# Altium PCB SPT3G_LCBoardRev2.PcbDoc (part 2 of 3)
Units mil, origin at the board's own origin, x right, y up, seen from the top; angles counter-clockwise.
Board outline 7216.28 x 1969 mil, 6 copper layers (Top Layer, Signal Layer 1, Internal Plane 1, Internal Plane 2, Signal Layer 2, Bottom Layer), stack 61.6 mil thick; 29 components, 149 nets, 695 pads, 136 vias.
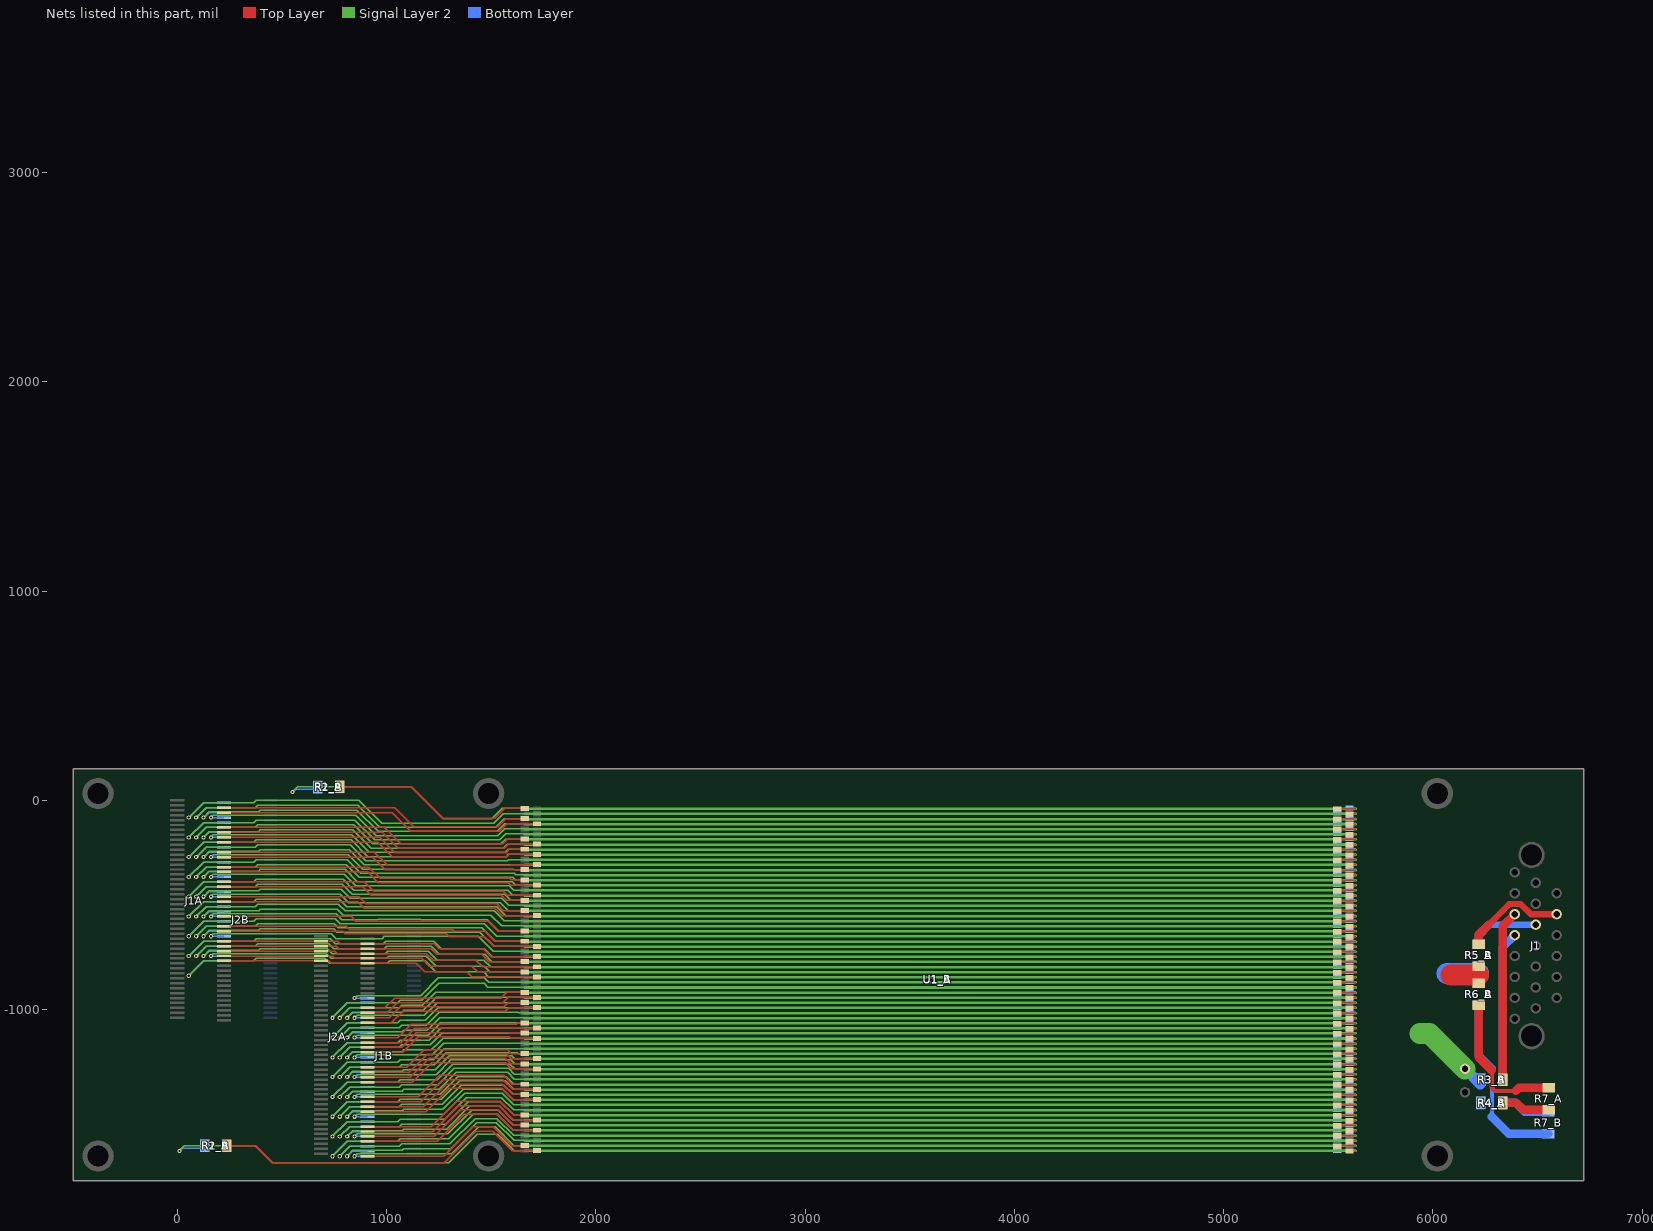
[diagram p6: the nets of this part, all layers, seen from the top]

## Via types
v1: diameter 20, hole 10, Top Layer to Bottom Layer, 136 vias

## Nets (pads, with @x,y where several pads share a name; then routed paths per layer and width w, separated by ;. In a path a pad name is that pad's centre, name@x,y a point inside that pad or via, vN(x,y) a via of type N, cw(c..) or ccw(c..) an arc to the next point about the centre after c; other vN are vias at no path point) (continued)
BOLORETURN_B: J1B.1 J1B.3 J1B.5 J1B.7 J1B.9 J1B.11 J1B.13 J1B.15 J1B.17 J1B.19 J1B.21 J1B.23 J1B.25 J1B.27 J1B.29 J1B.31 J1B.33 J1B.35 J1B.37 J1B.39 J1B.41 J1B.43 J1B.45 J1B.47 J1B.49 J1B.51 J1B.53 J1B.55 J1B.57 J1B.59 J1B.61 J1B.63 J1B.65 J2B.25 J2B.27 J2B.29 J2B.31 J2B.33 J2B.35 J2B.37 J2B.39 J2B.41 J2B.43 J2B.45 J2B.47 J2B.49 J2B.51 J2B.53 J2B.55 J2B.57 J2B.59 J2B.61 J2B.63 J2B.65 J2B.67 J2B.69 J2B.71 J2B.73 J2B.75 J2B.77 J2B.79 J2B.81 J2B.83 J2B.85 J2B.87 J2B.89 pad.0@6153.59,-1283.27 R1_B.1 R2_B.1 R3_B.1 R4_B.1 | length 368161.4
  Signal Layer 2 w6: v1(10.74,-1675.14) 34.64,-1651.23 34.74,-1651.33 373.22,-1651.33 453.76,-1731.87 1297.1,-1731.87 1433.61,-1595.35 ; v1(55.12,-838.58) 125.98,-767.72 366.67,-767.72 378.48,-755.91 704.48,-755.91 727.52,-778.94 ; v1(55.12,-744.09) 125.98,-673.23 366.67,-673.23 378.48,-661.42 731.57,-661.42 755.19,-685.04 ; v1(55.12,-649.61) 125.98,-578.74 366.67,-578.74 378.48,-566.93 755.66,-566.93 778.56,-589.83 965.39,-589.83 ; v1(55.12,-555.12) 125.98,-484.25 366.67,-484.25 378.48,-472.44 774.31,-472.44 810.77,-508.9 1482.39,-508.9 ; v1(55.12,-460.63) 125.98,-389.76 366.67,-389.76 378.48,-377.95 792.96,-377.95 843.91,-428.9 1482.39,-428.9 ; v1(55.12,-366.14) 125.98,-295.28 366.67,-295.28 378.48,-283.46 811.61,-283.46 877.05,-348.9 1482.39,-348.9 ; v1(55.12,-271.65) 125.98,-200.79 366.67,-200.79 378.48,-188.98 830.26,-188.98 910.18,-268.9 1482.39,-268.9 ; v1(55.12,-177.17) 125.98,-106.3 366.67,-106.3 378.48,-94.49 848.91,-94.49 943.32,-188.9 1482.39,-188.9 ; v1(55.12,-82.68) 125.98,-11.81 366.67,-11.81 378.48,0 867.55,0 976.46,-108.9 1482.39,-108.9 ; v1(90.55,-744.09) 137.8,-696.85 373.9,-696.85 385.71,-685.04 723.37,-685.04 746.99,-708.66 ; v1(90.55,-649.61) 137.8,-602.36 373.9,-602.36 385.71,-590.55 750.69,-590.55 769.74,-609.61 ; v1(90.55,-555.12) 137.8,-507.87 373.9,-507.87 385.71,-496.06 769.65,-496.06 802.49,-528.9 1482.39,-528.9 ; v1(90.55,-460.63) 137.8,-413.39 373.9,-413.39 385.71,-401.57 788.3,-401.57 835.63,-448.9 1482.39,-448.9 ; v1(90.55,-366.14) 137.8,-318.9 373.9,-318.9 385.71,-307.09 806.95,-307.09 868.76,-368.9 1482.39,-368.9 ; v1(90.55,-271.65) 137.8,-224.41 373.9,-224.41 385.71,-212.6 825.59,-212.6 901.9,-288.9 1482.39,-288.9 ; v1(90.55,-177.17) 137.8,-129.92 373.9,-129.92 385.71,-118.11 844.24,-118.11 935.04,-208.9 1482.39,-208.9 ; v1(90.55,-82.68) 137.8,-35.43 373.9,-35.43 385.71,-23.62 862.89,-23.62 968.17,-128.9 1482.39,-128.9 ; v1(125.98,-744.09) 153.54,-716.54 388.33,-716.54 396.2,-708.66 717.57,-708.66 741.28,-732.36 ; v1(125.98,-649.61) 153.54,-622.05 388.33,-622.05 396.2,-614.17 746.66,-614.17 762.09,-629.61 ; v1(125.98,-555.12) 153.54,-527.56 388.33,-527.56 396.2,-519.68 764.99,-519.68 794.2,-548.9 1482.39,-548.9 ; v1(125.98,-460.63) 153.54,-433.07 388.33,-433.07 396.2,-425.2 783.63,-425.2 827.34,-468.9 1482.39,-468.9 ; v1(125.98,-366.14) 153.54,-338.58 388.33,-338.58 396.2,-330.71 802.28,-330.71 860.48,-388.9 1482.39,-388.9 ; v1(125.98,-271.65) 153.54,-244.09 388.33,-244.09 396.2,-236.22 820.93,-236.22 893.61,-308.9 1482.39,-308.9 ; v1(125.98,-177.17) 153.54,-149.61 388.33,-149.61 396.2,-141.73 839.58,-141.73 926.75,-228.9 1482.39,-228.9 ; v1(125.98,-82.68) 153.54,-55.12 388.33,-55.12 396.2,-47.24 858.23,-47.24 959.89,-148.9 1482.39,-148.9 ; v1(161.42,-744.09) 173.23,-732.28 712.68,-732.28 736.3,-755.91 ; v1(161.42,-649.61) 173.23,-637.8 736.17,-637.8 759.79,-661.42 ; v1(161.42,-555.12) 173.23,-543.31 760.32,-543.31 786.84,-569.83 957.11,-569.83 957.33,-569.61 1164,-569.61 ; v1(161.42,-460.63) 173.23,-448.82 778.97,-448.82 819.06,-488.9 1482.39,-488.9 ; v1(161.42,-366.14) 173.23,-354.33 797.62,-354.33 852.19,-408.9 1482.39,-408.9 ; v1(161.42,-271.65) 173.23,-259.84 816.27,-259.84 885.33,-328.9 1482.39,-328.9 ; v1(161.42,-177.17) 173.23,-165.35 834.92,-165.35 918.47,-248.9 1482.39,-248.9 ; v1(161.42,-82.68) 173.23,-70.87 853.57,-70.87 951.6,-168.9 1482.39,-168.9 ; v1(550.8,40.1) 574.7,64 1118.5,64 1271.4,-88.9 ; 727.75,-779.53 908.43,-779.53 1004.43,-779.53 1016.24,-767.72 1184.37,-767.72 1236.29,-819.63 ; 735.95,-755.91 997.78,-755.91 1009.59,-744.09 1190.45,-744.09 1238.23,-791.87 ; v1(741.1,-1700.79) 811.97,-1629.92 1052.66,-1629.92 1064.47,-1618.11 1297.72,-1618.11 1415.13,-1500.7 ; v1(741.1,-1606.3) 811.97,-1535.43 1052.66,-1535.43 1064.47,-1523.62 1130.87,-1523.62 1279.07,-1523.62 1381.99,-1420.7 ; v1(741.1,-1511.81) 811.97,-1440.94 1052.66,-1440.94 1064.47,-1429.13 1130.87,-1429.13 1260.42,-1429.13 1348.86,-1340.7 ; v1(741.1,-1417.32) 811.97,-1346.46 1052.66,-1346.46 1064.47,-1334.65 1130.87,-1334.65 1241.77,-1334.65 1315.72,-1260.7 ; v1(741.1,-1322.83) 811.97,-1251.97 1052.66,-1251.97 1064.47,-1240.16 1130.87,-1240.16 1222.52,-1240.16 1247.87,-1214.8 ; v1(741.1,-1228.35) 811.97,-1157.48 1052.65,-1157.48 1064.47,-1145.67 1130.87,-1145.67 1203.87,-1145.67 1214.73,-1134.8 1215.34,-1134.8 1252.96,-1097.19 ; v1(741.1,-1133.86) 811.97,-1062.99 1052.65,-1062.99 1064.47,-1051.18 1130.87,-1051.18 1185.83,-1051.18 1231.43,-1005.57 ; v1(741.1,-1039.37) 811.97,-968.5 1052.66,-968.5 1064.47,-956.69 1130.87,-956.69 1167.18,-956.69 1248.73,-875.14 ; 741.12,-732.28 908.43,-732.28 993.12,-732.28 1004.93,-720.47 1199.42,-720.47 1243.06,-764.12 ; 746.79,-708.66 908.43,-708.66 988.46,-708.66 1000.27,-696.85 1213.1,-696.85 1252.61,-736.36 ; 754.9,-685.04 908.43,-685.04 983.42,-685.04 995.23,-673.23 1226.41,-673.23 1261.79,-708.61 ; 759.56,-661.42 908.43,-661.42 978.66,-661.42 989.23,-650.84 1129.63,-650.84 ; 761.99,-629.83 981.96,-629.83 982.18,-629.61 1139.15,-629.61 ; 770.28,-609.83 973.68,-609.83 973.9,-609.61 1147.43,-609.61 ; v1(776.54,-1700.79) 823.78,-1653.54 1059.88,-1653.54 1071.69,-1641.73 1302.38,-1641.73 1423.42,-1520.7 ; v1(776.54,-1606.3) 823.78,-1559.06 1059.88,-1559.06 1071.69,-1547.24 1130.87,-1547.24 1283.73,-1547.24 1390.28,-1440.7 ; v1(776.54,-1511.81) 823.78,-1464.57 1059.88,-1464.57 1071.69,-1452.76 1130.87,-1452.76 1265.08,-1452.76 1357.14,-1360.7 ; v1(776.54,-1417.32) 823.78,-1370.08 1059.88,-1370.08 1071.69,-1358.27 1130.87,-1358.27 1246.43,-1358.27 1324,-1280.7 ; v1(776.54,-1322.83) 823.78,-1275.59 1059.88,-1275.59 1071.69,-1263.78 1130.87,-1263.78 1227.18,-1263.78 1256.16,-1234.8 ; v1(776.54,-1228.35) 823.78,-1181.1 1059.88,-1181.1 1071.69,-1169.29 1130.87,-1169.29 1208.53,-1169.29 1223.02,-1154.8 1223.63,-1154.8 1257.73,-1120.7 ; v1(776.54,-1133.86) 823.78,-1086.61 1059.88,-1086.61 1071.69,-1074.8 1130.87,-1074.8 1190.49,-1074.8 1251.37,-1013.92 ; v1(776.54,-1039.37) 823.78,-992.13 1059.88,-992.13 1071.69,-980.31 1171.84,-980.31 1206.72,-945.43 ; v1(811.97,-1700.79) 839.53,-1673.23 1074.31,-1673.23 1082.19,-1665.35 1307.04,-1665.35 1431.7,-1540.7 ; v1(811.97,-1606.3) 839.53,-1578.74 1074.31,-1578.74 1082.19,-1570.87 1130.87,-1570.87 1288.39,-1570.87 1398.56,-1460.7 ; v1(811.97,-1511.81) 839.53,-1484.25 1074.31,-1484.25 1082.19,-1476.38 1130.87,-1476.38 1269.75,-1476.38 1365.43,-1380.7 ; v1(811.97,-1417.32) 839.53,-1389.76 1074.31,-1389.76 1082.19,-1381.89 1130.87,-1381.89 1251.1,-1381.89 1332.29,-1300.7 ; v1(811.97,-1322.83) 839.53,-1295.28 1074.31,-1295.28 1082.19,-1287.4 1130.87,-1287.4 1232.45,-1287.4 1299.15,-1220.7 ; v1(811.97,-1228.35) 839.53,-1200.79 1074.31,-1200.79 1082.19,-1192.91 1130.87,-1192.91 1213.19,-1192.91 1231.3,-1174.8 1231.91,-1174.8 1266.02,-1140.7 ; v1(811.97,-1133.86) 839.53,-1106.3 1074.31,-1106.3 1082.19,-1098.43 1130.87,-1098.43 1194.54,-1098.43 1198.17,-1094.8 1198.77,-1094.8 1251.9,-1041.68 ; v1(811.97,-1039.37) 839.53,-1011.81 1074.31,-1011.81 1082.19,-1003.94 1130.87,-1003.94 1176.5,-1003.94 1220.87,-959.57 ; v1(847.4,-1700.79) 859.21,-1688.98 1311.71,-1688.98 1439.98,-1560.7 ; v1(847.4,-1606.3) 859.21,-1594.49 1130.87,-1594.49 1293.06,-1594.49 1406.85,-1480.7 ; v1(847.4,-1511.81) 859.21,-1500 1130.87,-1500 1274.41,-1500 1373.71,-1400.7 ; v1(847.4,-1417.32) 859.21,-1405.51 1130.87,-1405.51 1255.76,-1405.51 1340.57,-1320.7 ; v1(847.4,-1322.83) 859.21,-1311.02 1130.87,-1311.02 1237.11,-1311.02 1307.44,-1240.7 ; v1(847.4,-1228.35) 859.21,-1216.54 1130.87,-1216.54 1217.85,-1216.54 1239.59,-1194.8 ; v1(847.4,-1133.86) 859.21,-1122.05 1130.87,-1122.05 1199.21,-1122.05 1206.45,-1114.8 1207.06,-1114.8 1252.43,-1069.43 ; v1(847.4,-1039.37) 859.21,-1027.56 1181.16,-1027.56 1235.01,-973.71 ; v1(847.4,-944.88) 859.21,-933.07 1162.52,-933.07 1248.2,-847.39 ; 965.61,-589.61 1155.72,-589.61 ; 1129.63,-650.88 1245.37,-650.65 ; 1139.37,-629.83 1276.09,-629.83 ; 1147.66,-609.83 1301.54,-609.83 ; 1155.94,-589.83 1326.98,-589.83 ; 1164.22,-569.83 1482.39,-569.83 ; 1272.62,-1161.77 1719.5,-1161.77 ; 1630.09,-1674.36 1660.44,-1674.36 ; 1630.09,-1649.95 1719.5,-1649.95 ; 1630.09,-1625.54 1660.44,-1625.54 ; 1630.09,-1601.14 1719.5,-1601.14 ; 1630.09,-1576.73 1660.44,-1576.73 ; 1630.09,-1552.32 1719.5,-1552.32 ; 1630.09,-1527.91 1660.44,-1527.91 ; 1630.09,-1503.5 1719.5,-1503.5 ; 1630.09,-1479.09 1660.44,-1479.09 ; 1630.09,-1454.68 1719.5,-1454.68 ; 1630.09,-1430.27 1660.44,-1430.27 ; 1630.09,-1405.86 1719.5,-1405.86 ; 1630.09,-1381.45 1660.44,-1381.45 ; 1630.09,-1357.04 1719.5,-1357.04 ; 1630.09,-1332.63 1660.44,-1332.63 ; 1630.09,-1308.22 1719.5,-1308.22 ; 1630.09,-1283.81 1660.44,-1283.81 ; 1630.09,-1259.4 1719.5,-1259.4 ; 1630.09,-1234.99 1660.44,-1234.99 ; 1630.09,-1210.58 1719.5,-1210.58 ; 1630.09,-1186.17 1660.44,-1186.17 ; 1630.09,-1137.36 1660.44,-1137.36 ; 1630.09,-1112.95 1719.5,-1112.95 ; 1630.09,-1088.54 1660.44,-1088.54 ; 1630.09,-1064.13 1719.5,-1064.13 ; 1630.09,-1039.72 1660.44,-1039.72 ; 1630.09,-1015.31 1719.5,-1015.31 ; 1630.09,-990.9 1660.44,-990.9 ; 1630.09,-966.49 1719.5,-966.49 ; 1630.09,-942.08 1660.44,-942.08 ; 1630.09,-917.67 1719.5,-917.67 ; 1630.09,-893.26 1660.44,-893.26 ; 1630.09,-868.85 1719.5,-868.85 ; 1630.09,-844.44 1660.44,-844.44 ; 1630.09,-820.03 1719.5,-820.03 ; 1630.09,-795.62 1660.44,-795.62 ; 1630.09,-771.21 1719.5,-771.21 ; 1630.09,-746.8 1660.44,-746.8 ; 1630.09,-722.39 1719.5,-722.39 ; 1630.09,-697.99 1660.44,-697.99 ; 1630.09,-673.58 1719.5,-673.58 ; 1630.09,-649.17 1660.44,-649.17 ; 1630.09,-624.76 1719.5,-624.76 ; 1630.09,-600.35 1660.44,-600.35 ; 1630.09,-575.94 1719.5,-575.94 ; 1630.09,-551.53 1660.44,-551.53 ; 1630.09,-527.12 1719.5,-527.12 ; 1630.09,-502.71 1660.44,-502.71 ; 1630.09,-478.3 1719.5,-478.3 ; 1630.09,-453.89 1660.44,-453.89 ; 1630.09,-429.48 1719.5,-429.48 ; 1630.09,-405.07 1660.44,-405.07 ; 1630.09,-380.66 1719.5,-380.66 ; 1630.09,-356.25 1660.44,-356.25 ; 1630.09,-331.84 1719.5,-331.84 ; 1630.09,-307.43 1660.44,-307.43 ; 1630.09,-283.02 1719.5,-283.02 ; 1630.09,-258.62 1660.44,-258.62 ; 1630.09,-234.21 1719.5,-234.21 ; 1630.09,-209.8 1660.44,-209.8 ; 1630.09,-185.39 1719.5,-185.39 ; 1630.09,-160.98 1660.44,-160.98 ; 1630.09,-136.57 1719.5,-136.57 ; 1630.09,-112.16 1660.44,-112.16 ; 1630.09,-87.75 1719.5,-87.75 ; 1630.09,-63.34 1660.44,-63.34 ; 1630.09,-38.93 1719.5,-38.93
  Signal Layer 2 w6.01: 1206.72,-945.43 1234.48,-917.67 1630.09,-917.67 ; 1220.87,-959.57 1238.36,-942.08 1630.09,-942.08 ; 1231.43,-1005.57 1246.11,-990.9 1630.09,-990.9 ; 1235.01,-973.71 1242.23,-966.49 1630.09,-966.49 ; 1236.29,-819.63 1463.56,-819.63 1488.37,-844.44 1630.09,-844.44 ; 1238.23,-791.87 1465.87,-791.87 1494.03,-820.03 1630.09,-820.03 ; 1239.59,-1194.8 1272.62,-1161.77 ; 1243.06,-764.12 1465.32,-764.12 1496.82,-795.62 1630.09,-795.62 ; 1245.37,-650.65 1437.75,-650.65 1509.5,-722.39 1630.09,-722.39 ; 1247.87,-1214.8 1276.5,-1186.17 1630.09,-1186.17 ; 1248.2,-847.39 1467.69,-847.39 1489.16,-868.85 1630.09,-868.85 ; 1248.73,-875.14 1466.09,-875.14 1484.21,-893.26 1630.09,-893.26 ; 1251.37,-1013.92 1628.7,-1013.92 1630.09,-1015.31 ; 1251.9,-1041.68 1253.86,-1039.72 1630.09,-1039.72 ; 1252.43,-1069.43 1257.73,-1064.13 1630.09,-1064.13 ; 1252.61,-736.36 1469.06,-736.36 1503.91,-771.21 1630.09,-771.21 ; 1252.96,-1097.19 1261.61,-1088.54 1630.09,-1088.54 ; 1256.16,-1234.8 1285.14,-1205.82 1625.33,-1205.82 1630.09,-1210.58 ; 1257.73,-1120.7 1265.48,-1112.95 1630.09,-1112.95 ; 1261.79,-708.61 1467.07,-708.61 1505.27,-746.8 1630.09,-746.8 ; 1266.02,-1140.7 1269.36,-1137.36 1630.09,-1137.36 ; 1271.4,-88.9 1503.65,-88.9 1553.62,-38.93 1630.09,-38.93 ; 1276.09,-629.83 1446.28,-629.83 1514.44,-697.99 1630.09,-697.99 ; 1299.15,-1220.7 1599.32,-1220.7 1613.62,-1234.99 1630.09,-1234.99 ; 1301.54,-609.83 1454.91,-609.83 1518.66,-673.58 1630.09,-673.58 ; 1307.44,-1240.7 1594.23,-1240.7 1612.94,-1259.4 1630.09,-1259.4 ; 1315.72,-1260.7 1589.55,-1260.7 1612.67,-1283.81 1630.09,-1283.81 ; 1324,-1280.7 1583.74,-1280.7 1611.26,-1308.22 1630.09,-1308.22 ; 1326.98,-589.83 1466.41,-589.83 1525.75,-649.17 1630.09,-649.17 ; 1332.29,-1300.7 1579.54,-1300.7 1611.47,-1332.63 1630.09,-1332.63 ; 1340.57,-1320.7 1571.03,-1320.7 1607.37,-1357.04 1630.09,-1357.04 ; 1348.86,-1340.7 1566.83,-1340.7 1607.58,-1381.45 1630.09,-1381.45 ; 1357.14,-1360.7 1560.47,-1360.7 1605.63,-1405.86 1630.09,-1405.86 ; 1365.43,-1380.7 1555.73,-1380.7 1605.3,-1430.27 1630.09,-1430.27 ; 1373.71,-1400.7 1553.68,-1400.7 1607.66,-1454.68 1630.09,-1454.68 ; 1381.99,-1420.7 1548.94,-1420.7 1607.33,-1479.09 1630.09,-1479.09 ; 1390.28,-1440.7 1544.2,-1440.7 1607,-1503.5 1630.09,-1503.5 ; 1398.56,-1460.7 1537.85,-1460.7 1605.05,-1527.91 1630.09,-1527.91 ; 1406.85,-1480.7 1534.18,-1480.7 1605.8,-1552.32 1630.09,-1552.32 ; 1415.13,-1500.7 1528.36,-1500.7 1604.39,-1576.73 1630.09,-1576.73 ; 1423.42,-1520.7 1526.85,-1520.7 1607.29,-1601.14 1630.09,-1601.14 ; 1431.7,-1540.7 1524.26,-1540.7 1609.11,-1625.54 1630.09,-1625.54 ; 1433.61,-1595.35 1530.51,-1595.35 1609.52,-1674.36 1630.09,-1674.36 ; 1439.98,-1560.7 1519.52,-1560.7 1608.78,-1649.95 1630.09,-1649.95 ; 1482.39,-569.83 1537.32,-624.76 1630.09,-624.76 ; 1482.39,-548.9 1498.66,-548.9 1550.1,-600.35 1630.09,-600.35 ; 1482.39,-528.9 1515.24,-528.9 1562.27,-575.94 1630.09,-575.94 ; 1482.39,-508.9 1526.14,-508.9 1568.77,-551.53 1630.09,-551.53 ; 1482.39,-488.9 1542.51,-488.9 1580.73,-527.12 1630.09,-527.12 ; 1482.39,-468.9 1549.99,-468.9 1583.79,-502.71 1630.09,-502.71 ; 1482.39,-448.9 1563.93,-448.9 1593.33,-478.3 1630.09,-478.3 ; 1482.39,-428.9 1578.28,-428.9 1603.27,-453.89 1630.09,-453.89 ; 1482.39,-408.9 1586.97,-408.9 1607.55,-429.48 1630.09,-429.48 ; 1482.39,-388.9 1600.91,-388.9 1617.08,-405.07 1630.09,-405.07 ; 1482.39,-368.9 1603.54,-368.9 1615.3,-380.66 1630.09,-380.66 ; 1482.39,-348.9 1609.81,-348.9 1617.16,-356.25 1630.09,-356.25 ; 1482.39,-328.9 1608.8,-328.9 1611.74,-331.84 1630.09,-331.84 ; 1482.39,-308.9 1628.62,-308.9 ; 1482.39,-288.9 1577.54,-288.9 1583.42,-283.02 1630.09,-283.02 ; 1482.39,-268.9 1572.09,-268.9 1582.38,-258.62 1630.09,-258.62 ; 1482.39,-248.9 1566.23,-248.9 1580.92,-234.21 1630.09,-234.21 ; 1482.39,-228.9 1557.54,-228.9 1576.64,-209.8 1630.09,-209.8 ; 1482.39,-208.9 1546.42,-208.9 1569.94,-185.39 1630.09,-185.39 ; 1482.39,-188.9 1541.45,-188.9 1569.38,-160.98 1630.09,-160.98 ; 1482.39,-168.9 1532.31,-168.9 1564.65,-136.57 1630.09,-136.57 ; 1482.39,-148.9 1528.69,-148.9 1565.44,-112.16 1630.09,-112.16 ; 1482.39,-128.9 1521.13,-128.9 1562.28,-87.75 1630.09,-87.75 ; 1482.39,-108.9 1511.99,-108.9 1557.56,-63.34 1630.09,-63.34
  Signal Layer 2 w12: 1660,-1675.33 5632.04,-1675.33 ; 1660,-1650.93 5632.04,-1650.93 ; 1660,-1626.54 5632.04,-1626.54 ; 1660,-1602.14 5632.04,-1602.14 ; 1660,-1577.74 5632.04,-1577.74 ; 1660,-1553.34 5632.04,-1553.34 ; 1660,-1528.95 5632.04,-1528.95 ; 1660,-1504.55 5632.04,-1504.55 ; 1660,-1480.15 5632.04,-1480.15 ; 1660,-1455.75 5632.04,-1455.75 ; 1660,-1431.35 5632.04,-1431.35 ; 1660,-1406.96 5632.04,-1406.96 ; 1660,-1382.56 5632.04,-1382.56 ; 1660,-1358.16 5632.04,-1358.16 ; 1660,-1333.76 5632.04,-1333.76 ; 1660,-1309.37 5632.04,-1309.37 ; 1660,-1284.97 5632.04,-1284.97 ; 1660,-1260.57 5632.04,-1260.57 ; 1660,-1236.17 5632.04,-1236.17 ; 1660,-1211.78 5632.04,-1211.78 ; 1660,-1187.38 5632.04,-1187.38 ; 1660,-1162.98 5632.04,-1162.98 ; 1660,-1138.58 5632.04,-1138.58 ; 1660,-1114.19 5632.04,-1114.19 ; 1660,-1089.79 5632.04,-1089.79 ; 1660,-1065.39 5632.04,-1065.39 ; 1660,-1040.99 5632.04,-1040.99 ; 1660,-1016.6 5632.04,-1016.6 ; 1660,-992.2 5632.04,-992.2 ; 1660,-967.8 5632.04,-967.8 ; 1660,-943.4 5632.04,-943.4 ; 1660,-919.01 5632.04,-919.01 ; 1660,-894.61 5632.04,-894.61 ; 1660,-870.21 5632.04,-870.21 ; 1660,-845.81 5632.04,-845.81 ; 1660,-821.41 5632.04,-821.41 ; 1660,-797.02 5632.04,-797.02 ; 1660,-772.62 5632.04,-772.62 ; 1660,-748.22 5632.04,-748.22 ; 1660,-723.82 5632.04,-723.82 ; 1660,-699.43 5632.04,-699.43 ; 1660,-675.03 5632.04,-675.03 ; 1660,-650.63 5632.04,-650.63 ; 1660,-626.23 5632.04,-626.23 ; 1660,-601.84 5632.04,-601.84 ; 1660,-577.44 5632.04,-577.44 ; 1660,-553.04 5632.04,-553.04 ; 1660,-528.64 5632.04,-528.64 ; 1660,-504.25 5632.04,-504.25 ; 1660,-479.85 5632.04,-479.85 ; 1660,-455.45 5632.04,-455.45 ; 1660,-431.05 5632.04,-431.05 ; 1660,-406.66 5632.04,-406.66 ; 1660,-382.26 5632.04,-382.26 ; 1660,-357.86 5632.04,-357.86 ; 1660,-333.46 5632.04,-333.46 ; 1660,-309.07 5632.04,-309.07 ; 1660,-284.67 5632.04,-284.67 ; 1660,-260.27 5632.04,-260.27 ; 1660,-235.87 5632.04,-235.87 ; 1660,-211.47 5632.04,-211.47 ; 1660,-187.08 5632.04,-187.08 ; 1660,-162.68 5632.04,-162.68 ; 1660,-138.28 5632.04,-138.28 ; 1660,-113.88 5632.04,-113.88 ; 1660,-89.49 5632.04,-89.49 ; 1660,-65.09 5632.04,-65.09 ; 1660,-40.69 5632.04,-40.69
  Signal Layer 2 w100: 5937.35,-1114.19 5984.5,-1114.19 pad.0@6153.59,-1283.27
  Bottom Layer w6: v1(10.74,-1675.14) 22.95,-1662.93 R1_B.1@131.91,-1662.93 ; v1(55.12,-838.58) 125.98,-767.72 J2B.25@222.44,-767.72 ; v1(55.12,-744.09) 125.98,-673.23 J2B.33@222.44,-673.23 ; v1(55.12,-649.61) 125.98,-578.74 J2B.41@222.44,-578.74 ; v1(55.12,-555.12) 125.98,-484.25 J2B.49@222.44,-484.25 ; v1(55.12,-460.63) 125.98,-389.76 J2B.57@222.44,-389.76 ; v1(55.12,-366.14) 125.98,-295.28 J2B.65@222.44,-295.28 ; v1(55.12,-271.65) 125.98,-200.79 J2B.73@222.44,-200.79 ; v1(55.12,-177.17) 125.98,-106.3 J2B.81@222.44,-106.3 ; v1(55.12,-82.68) 125.98,-11.81 J2B.89@222.44,-11.81 ; v1(90.55,-744.09) 137.8,-696.85 J2B.31@222.44,-696.85 ; v1(90.55,-649.61) 137.8,-602.36 J2B.39@222.44,-602.36 ; v1(90.55,-555.12) 137.8,-507.87 J2B.47@222.44,-507.87 ; v1(90.55,-460.63) 137.8,-413.39 J2B.55@222.44,-413.39 ; v1(90.55,-366.14) 137.8,-318.9 J2B.63@222.44,-318.9 ; v1(90.55,-271.65) 137.8,-224.41 J2B.71@222.44,-224.41 ; v1(90.55,-177.17) 137.8,-129.92 J2B.79@222.44,-129.92 ; v1(90.55,-82.68) 137.8,-35.43 J2B.87@222.44,-35.43 ; v1(125.98,-744.09) 149.61,-720.47 J2B.29@222.44,-720.47 ; v1(125.98,-649.61) 149.61,-625.98 J2B.37@222.44,-625.98 ; v1(125.98,-555.12) 149.61,-531.5 J2B.45@222.44,-531.5 ; v1(125.98,-460.63) 149.61,-437.01 J2B.53@222.44,-437.01 ; v1(125.98,-366.14) 149.61,-342.52 J2B.61@222.44,-342.52 ; v1(125.98,-271.65) 149.61,-248.03 J2B.69@222.44,-248.03 ; v1(125.98,-177.17) 149.61,-153.54 J2B.77@222.44,-153.54 ; v1(125.98,-82.68) 149.61,-59.06 J2B.85@222.44,-59.06 ; v1(161.42,-744.09) J2B.27@222.44,-744.09 ; v1(161.42,-649.61) J2B.35@222.44,-649.61 ; v1(161.42,-555.12) J2B.43@222.44,-555.12 ; v1(161.42,-460.63) J2B.51@222.44,-460.63 ; v1(161.42,-366.14) J2B.59@222.44,-366.14 ; v1(161.42,-271.65) J2B.67@222.44,-271.65 ; v1(161.42,-177.17) J2B.75@222.44,-177.17 ; v1(161.42,-82.68) J2B.83@222.44,-82.68 ; v1(550.8,40.1) 563.01,52.31 R2_B.1@671.97,52.31 ; v1(741.1,-1700.79) 811.97,-1629.92 J1B.7@908.43,-1629.92 ; v1(741.1,-1606.3) 811.97,-1535.43 J1B.15@908.43,-1535.43 ; v1(741.1,-1511.81) 811.97,-1440.94 J1B.23@908.43,-1440.94 ; v1(741.1,-1417.32) 811.97,-1346.46 J1B.31@908.43,-1346.46 ; v1(741.1,-1322.83) 811.97,-1251.97 J1B.39@908.43,-1251.97 ; v1(741.1,-1228.35) 811.97,-1157.48 J1B.47@908.43,-1157.48 ; v1(741.1,-1133.86) 811.97,-1062.99 J1B.55@908.43,-1062.99 ; v1(741.1,-1039.37) 811.97,-968.5 J1B.63@908.43,-968.5 ; v1(776.54,-1700.79) 823.78,-1653.54 J1B.5@908.43,-1653.54 ; v1(776.54,-1606.3) 823.78,-1559.06 J1B.13@908.43,-1559.06 ; v1(776.54,-1511.81) 823.78,-1464.57 J1B.21@908.43,-1464.57 ; v1(776.54,-1417.32) 823.78,-1370.08 J1B.29@908.43,-1370.08 ; v1(776.54,-1322.83) 823.78,-1275.59 J1B.37@908.43,-1275.59 ; v1(776.54,-1228.35) 823.78,-1181.1 J1B.45@908.43,-1181.1 ; v1(776.54,-1133.86) 823.78,-1086.61 J1B.53@908.43,-1086.61 ; v1(776.54,-1039.37) 823.78,-992.13 J1B.61@908.43,-992.13 ; v1(811.97,-1700.79) 835.59,-1677.17 J1B.3@908.43,-1677.17 ; v1(811.97,-1606.3) 835.59,-1582.68 J1B.11@908.43,-1582.68 ; v1(811.97,-1511.81) 835.59,-1488.19 J1B.19@908.43,-1488.19 ; v1(811.97,-1417.32) 835.59,-1393.7 J1B.27@908.43,-1393.7 ; v1(811.97,-1322.83) 835.59,-1299.21 J1B.35@908.43,-1299.21 ; v1(811.97,-1228.35) 835.59,-1204.72 J1B.43@908.43,-1204.72 ; v1(811.97,-1133.86) 835.59,-1110.24 J1B.51@908.43,-1110.24 ; v1(811.97,-1039.37) 835.59,-1015.75 J1B.59@908.43,-1015.75 ; v1(847.4,-1700.79) J1B.1@908.43,-1700.79 ; v1(847.4,-1606.3) J1B.9@908.43,-1606.3 ; v1(847.4,-1511.81) J1B.17@908.43,-1511.81 ; v1(847.4,-1417.32) J1B.25@908.43,-1417.32 ; v1(847.4,-1322.83) J1B.33@908.43,-1322.83 ; v1(847.4,-1228.35) J1B.41@908.43,-1228.35 ; v1(847.4,-1133.86) J1B.49@908.43,-1133.86 ; v1(847.4,-1039.37) J1B.57@908.43,-1039.37 ; v1(847.4,-944.88) J1B.65@908.43,-944.88
  Bottom Layer w10: R3_B.1@6226.9,-1333.27 R3_B.1@6228.48,-1334.85
  Bottom Layer w50: pad.0@6153.59,-1283.27 R3_B.1@6226.9,-1356.58
BOLORETURNMD_A: J1.19 R3_A.2 | length 814.7
  Top Layer w40: R3_A.2@6333.69,-1335.09 6333.69,-601.83 J1.19@6391.24,-544.27
BOLORETURNMD_B: J1.18 R3_B.2 | length 714.5
  Bottom Layer w40: R3_B.2@6333.48,-1334.85 6333.48,-702.03 J1.18@6391.24,-644.27
BOLORETURNZIFF_A: R4_A.2 R7_A.1 | length 247.1
  Top Layer w20: R4_A.2@6333.75,-1446.59 R4_A.2@6344.38,-1435.96
  Top Layer w40: R4_A.2@6333.75,-1446.59 6400.36,-1446.59 6432.44,-1478.67 R7_A.1@6552.49,-1478.67
BOLORETURNZIFF_B: R4_B.2 R7_B.1 | length 234.4
  Bottom Layer w40: R4_B.2@6333.97,-1445.95 6395.99,-1445.95 6437.73,-1487.69 R7_B.1@6551.1,-1487.69
BOTCOMBMD: J1.7 R5_B.2 | length 336.8
  Bottom Layer w30: 6265.84,-596.78 6268.36,-594.27 J1.7@6491.24,-594.27
  Bottom Layer w40: R5_B.2@6219.44,-687.88 6219.44,-643.18 6265.84,-596.78
COMB_A: R5_A.1 R6_A.1 U1_A.69 U1_A.70 U1_A.71 U1_A.72 U1_A.73 U1_A.74 U1_A.75 U1_A.76 U1_A.77 U1_A.78 U1_A.79 U1_A.80 U1_A.81 U1_A.82 U1_A.83 U1_A.84 U1_A.85 U1_A.86 U1_A.87 U1_A.88 U1_A.89 U1_A.90 U1_A.91 U1_A.92 U1_A.93 U1_A.94 U1_A.95 U1_A.96 U1_A.97 U1_A.98 U1_A.99 U1_A.100 U1_A.101 U1_A.102 U1_A.103 U1_A.104 U1_A.105 U1_A.106 U1_A.107 U1_A.108 U1_A.109 U1_A.110 U1_A.111 U1_A.112 U1_A.113 U1_A.114 U1_A.115 U1_A.116 U1_A.117 U1_A.118 U1_A.119 U1_A.120 U1_A.121 U1_A.122 U1_A.123 U1_A.124 U1_A.125 U1_A.126 U1_A.127 U1_A.128 U1_A.129 U1_A.130 U1_A.131 U1_A.132 U1_A.133 U1_A.134 U1_A.135 U1_A.136 | length 4204.3
  Top Layer w6: U1_A.70@5542.63,-1651.52 5632.04,-1651.52 ; U1_A.72@5542.63,-1602.7 5632.04,-1602.7 ; U1_A.74@5542.63,-1553.88 5632.04,-1553.88 ; U1_A.76@5542.63,-1505.06 5632.04,-1505.06 ; U1_A.78@5542.63,-1456.24 5632.04,-1456.24 ; U1_A.80@5542.63,-1407.43 5632.04,-1407.43 ; U1_A.82@5542.63,-1358.61 5632.04,-1358.61 ; U1_A.84@5542.63,-1309.79 5632.04,-1309.79 ; U1_A.86@5542.63,-1260.97 5632.04,-1260.97 ; U1_A.88@5542.63,-1212.15 5632.04,-1212.15 ; U1_A.90@5542.63,-1163.33 5632.04,-1163.33 ; U1_A.92@5542.63,-1114.51 5632.04,-1114.51 ; U1_A.94@5542.63,-1065.69 5632.04,-1065.69 ; U1_A.96@5542.63,-1016.87 5632.04,-1016.87 ; U1_A.98@5542.63,-968.06 5632.04,-968.06 ; U1_A.100@5542.63,-919.24 5632.04,-919.24 ; U1_A.102@5542.63,-870.42 5632.04,-870.42 ; U1_A.104@5542.63,-821.6 5632.04,-821.6 ; U1_A.106@5542.63,-772.78 5632.04,-772.78 ; U1_A.108@5542.63,-723.96 5632.04,-723.96 ; U1_A.110@5542.63,-675.14 5632.04,-675.14 ; U1_A.112@5542.63,-626.32 5632.04,-626.32 ; U1_A.114@5542.63,-577.5 5632.04,-577.5 ; U1_A.116@5542.63,-528.69 5632.04,-528.69 ; U1_A.118@5542.63,-479.87 5632.04,-479.87 ; U1_A.120@5542.63,-431.05 5632.04,-431.05 ; U1_A.122@5542.63,-382.23 5632.04,-382.23 ; U1_A.124@5542.63,-333.41 5632.04,-333.41 ; U1_A.126@5542.63,-284.59 5632.04,-284.59 ; U1_A.128@5542.63,-235.77 5632.04,-235.77 ; U1_A.130@5542.63,-186.95 5632.04,-186.95 ; U1_A.132@5542.63,-138.13 5632.04,-138.13 ; U1_A.134@5542.63,-89.32 5632.04,-89.32 ; U1_A.136@5542.63,-40.5 5632.04,-40.5 ; U1_A.69@5601.69,-1675.93 5632.04,-1675.93 ; U1_A.71@5601.69,-1627.11 5632.04,-1627.11 ; U1_A.73@5601.69,-1578.29 5632.04,-1578.29 ; U1_A.75@5601.69,-1529.47 5632.04,-1529.47 ; U1_A.77@5601.69,-1480.65 5632.04,-1480.65 ; U1_A.79@5601.69,-1431.83 5632.04,-1431.83 ; U1_A.81@5601.69,-1383.02 5632.04,-1383.02 ; U1_A.83@5601.69,-1334.2 5632.04,-1334.2 ; U1_A.85@5601.69,-1285.38 5632.04,-1285.38 ; U1_A.87@5601.69,-1236.56 5632.04,-1236.56 ; U1_A.89@5601.69,-1187.74 5632.04,-1187.74 ; U1_A.91@5601.69,-1138.92 5632.04,-1138.92 ; U1_A.93@5601.69,-1090.1 5632.04,-1090.1 ; U1_A.95@5601.69,-1041.28 5632.04,-1041.28 ; U1_A.97@5601.69,-992.46 5632.04,-992.46 ; U1_A.99@5601.69,-943.65 5632.04,-943.65 ; U1_A.101@5601.69,-894.83 5632.04,-894.83 ; U1_A.103@5601.69,-846.01 5632.04,-846.01 ; U1_A.105@5601.69,-797.19 5632.04,-797.19 ; U1_A.107@5601.69,-748.37 5632.04,-748.37 ; U1_A.109@5601.69,-699.55 5632.04,-699.55 ; U1_A.111@5601.69,-650.73 5632.04,-650.73 ; U1_A.113@5601.69,-601.91 5632.04,-601.91 ; U1_A.115@5601.69,-553.09 5632.04,-553.09 ; U1_A.117@5601.69,-504.28 5632.04,-504.28 ; U1_A.119@5601.69,-455.46 5632.04,-455.46 ; U1_A.121@5601.69,-406.64 5632.04,-406.64 ; U1_A.123@5601.69,-357.82 5632.04,-357.82 ; U1_A.125@5601.69,-309 5632.04,-309 ; U1_A.127@5601.69,-260.18 5632.04,-260.18 ; U1_A.129@5601.69,-211.36 5632.04,-211.36 ; U1_A.131@5601.69,-162.54 5632.04,-162.54 ; U1_A.133@5601.69,-113.72 5632.04,-113.72 ; U1_A.135@5601.69,-64.91 5632.04,-64.91
  Top Layer w100: 6086.38,-834 6219.05,-834
COMB_B: R5_B.1 R6_B.1 U1_B.69 U1_B.70 U1_B.71 U1_B.72 U1_B.73 U1_B.74 U1_B.75 U1_B.76 U1_B.77 U1_B.78 U1_B.79 U1_B.80 U1_B.81 U1_B.82 U1_B.83 U1_B.84 U1_B.85 U1_B.86 U1_B.87 U1_B.88 U1_B.89 U1_B.90 U1_B.91 U1_B.92 U1_B.93 U1_B.94 U1_B.95 U1_B.96 U1_B.97 U1_B.98 U1_B.99 U1_B.100 U1_B.101 U1_B.102 U1_B.103 U1_B.104 U1_B.105 U1_B.106 U1_B.107 U1_B.108 U1_B.109 U1_B.110 U1_B.111 U1_B.112 U1_B.113 U1_B.114 U1_B.115 U1_B.116 U1_B.117 U1_B.118 U1_B.119 U1_B.120 U1_B.121 U1_B.122 U1_B.123 U1_B.124 U1_B.125 U1_B.126 U1_B.127 U1_B.128 U1_B.129 U1_B.130 U1_B.131 U1_B.132 U1_B.133 U1_B.134 U1_B.135 U1_B.136 | length 4224.1
  Bottom Layer w6: U1_B.136@5542.72,-1672.69 5632.13,-1672.69 ; U1_B.134@5542.72,-1623.87 5632.13,-1623.87 ; U1_B.132@5542.72,-1575.05 5632.13,-1575.05 ; U1_B.130@5542.72,-1526.23 5632.13,-1526.23 ; U1_B.128@5542.72,-1477.41 5632.13,-1477.41 ; U1_B.126@5542.72,-1428.6 5632.13,-1428.6 ; U1_B.124@5542.72,-1379.78 5632.13,-1379.78 ; U1_B.122@5542.72,-1330.96 5632.13,-1330.96 ; U1_B.120@5542.72,-1282.14 5632.13,-1282.14 ; U1_B.118@5542.72,-1233.32 5632.13,-1233.32 ; U1_B.116@5542.72,-1184.5 5632.13,-1184.5 ; U1_B.114@5542.72,-1135.68 5632.13,-1135.68 ; U1_B.112@5542.72,-1086.86 5632.13,-1086.86 ; U1_B.110@5542.72,-1038.04 5632.13,-1038.04 ; U1_B.108@5542.72,-989.23 5632.13,-989.23 ; U1_B.106@5542.72,-940.41 5632.13,-940.41 ; U1_B.104@5542.72,-891.59 5632.13,-891.59 ; U1_B.102@5542.72,-842.77 5632.13,-842.77 ; U1_B.100@5542.72,-793.95 5632.13,-793.95 ; U1_B.98@5542.72,-745.13 5632.13,-745.13 ; U1_B.96@5542.72,-696.31 5632.13,-696.31 ; U1_B.94@5542.72,-647.49 5632.13,-647.49 ; U1_B.92@5542.72,-598.67 5632.13,-598.67 ; U1_B.90@5542.72,-549.86 5632.13,-549.86 ; U1_B.88@5542.72,-501.04 5632.13,-501.04 ; U1_B.86@5542.72,-452.22 5632.13,-452.22 ; U1_B.84@5542.72,-403.4 5632.13,-403.4 ; U1_B.82@5542.72,-354.58 5632.13,-354.58 ; U1_B.80@5542.72,-305.76 5632.13,-305.76 ; U1_B.78@5542.72,-256.94 5632.13,-256.94 ; U1_B.76@5542.72,-208.12 5632.13,-208.12 ; U1_B.74@5542.72,-159.3 5632.13,-159.3 ; U1_B.72@5542.72,-110.49 5632.13,-110.49 ; U1_B.70@5542.72,-61.67 5632.13,-61.67 ; U1_B.135@5601.78,-1648.28 5632.13,-1648.28 ; U1_B.133@5601.78,-1599.46 5632.13,-1599.46 ; U1_B.131@5601.78,-1550.64 5632.13,-1550.64 ; U1_B.129@5601.78,-1501.82 5632.13,-1501.82 ; U1_B.127@5601.78,-1453.01 5632.13,-1453.01 ; U1_B.125@5601.78,-1404.19 5632.13,-1404.19 ; U1_B.123@5601.78,-1355.37 5632.13,-1355.37 ; U1_B.121@5601.78,-1306.55 5632.13,-1306.55 ; U1_B.119@5601.78,-1257.73 5632.13,-1257.73 ; U1_B.117@5601.78,-1208.91 5632.13,-1208.91 ; U1_B.115@5601.78,-1160.09 5632.13,-1160.09 ; U1_B.113@5601.78,-1111.27 5632.13,-1111.27 ; U1_B.111@5601.78,-1062.45 5632.13,-1062.45 ; U1_B.109@5601.78,-1013.64 5632.13,-1013.64 ; U1_B.107@5601.78,-964.82 5632.13,-964.82 ; U1_B.105@5601.78,-916 5632.13,-916 ; U1_B.103@5601.78,-867.18 5632.13,-867.18 ; U1_B.101@5601.78,-818.36 5632.13,-818.36 ; U1_B.99@5601.78,-769.54 5632.13,-769.54 ; U1_B.97@5601.78,-720.72 5632.13,-720.72 ; U1_B.95@5601.78,-671.9 5632.13,-671.9 ; U1_B.93@5601.78,-623.08 5632.13,-623.08 ; U1_B.91@5601.78,-574.26 5632.13,-574.26 ; U1_B.89@5601.78,-525.45 5632.13,-525.45 ; U1_B.87@5601.78,-476.63 5632.13,-476.63 ; U1_B.85@5601.78,-427.81 5632.13,-427.81 ; U1_B.83@5601.78,-378.99 5632.13,-378.99 ; U1_B.81@5601.78,-330.17 5632.13,-330.17 ; U1_B.79@5601.78,-281.35 5632.13,-281.35 ; U1_B.77@5601.78,-232.53 5632.13,-232.53 ; U1_B.75@5601.78,-183.71 5632.13,-183.71 ; U1_B.73@5601.78,-134.89 5632.13,-134.89 ; U1_B.71@5601.78,-86.08 5632.13,-86.08 ; U1_B.69@5601.78,-37.26 5632.13,-37.26
  Bottom Layer w100: 6066.54,-826.77 6219,-826.77
COMBMD_A: J1.8 R5_A.2 | length 498.7
  Top Layer w30: 6265.85,-595.15 6266.32,-594.68 6364.93,-496.06 6420.63,-496.06 6468.56,-543.99 6468.56,-544.27 J1.8@6591.24,-544.27
  Top Layer w40: R5_A.2@6219.05,-687.87 6219.05,-641.95 6265.85,-595.15
COMBZIFF_A: R6_A.2 R7_A.2 | length 704.3
  Top Layer w20: 6281.24,-1290.05 6281.24,-1373.43 6296.85,-1389.04 6395.83,-1389.04
  Top Layer w40: R6_A.2@6219.05,-979.02 6219.05,-1227.86 6281.24,-1290.05 ; 6395.83,-1389.04 6411.2,-1373.67 R7_A.2@6552.49,-1373.67
COMBZIFF_B: R6_B.2 R7_B.2 | length 863.8
  Bottom Layer w20: 6281.8,-1510.84 6281.8,-1283
  Bottom Layer w40: R6_B.2@6219,-978.35 R6_B.2@6219.69,-979.04 ; R6_B.2@6219.69,-978.35 R6_B.2@6219.69,-979.04 ; 6281.8,-1510.84 6281.8,-1513.23 6361.27,-1592.69 R7_B.2@6551.1,-1592.69 ; 6281.8,-1283 6219.69,-1220.9 R6_B.2@6219.69,-979.04
FREQA0: J2A.46 U1_A.45 | length 782.5
  Top Layer w6: J2A.46@908.43,-1181.1 1071.77,-1181.1 1142.75,-1110.12 1462,-1110.12 ; 1630,-1112.84 U1_A.45@1660.35,-1112.84
  Top Layer w6.01: 1462,-1110.12 1584.25,-1110.12 1586.97,-1112.84 1630,-1112.84
FREQA1: J2A.36 U1_A.40 | length 840.9
  Top Layer w6: J2A.36@908.43,-1062.99 1023.68,-1062.99 1079,-1007.67 1462,-1007.67 ; 1630,-990.79 U1_A.40@1719.4,-990.79
  Top Layer w6.01: 1462,-1007.67 1566.62,-1007.67 1583.5,-990.79 1630,-990.79
FREQA2: J1A.24 U1_A.13 | length 1462.8
  Top Layer w6: J1A.24@222.44,-271.65 933.62,-271.65 993.46,-331.5 1462,-331.5 ; 1630,-331.74 U1_A.13@1660.35,-331.74
  Top Layer w6.01: 1462,-331.5 1629.76,-331.5 1630,-331.74
FREQA3: J1A.52 U1_A.27 | length 1467.4
  Top Layer w6: J1A.52@222.44,-602.36 808.16,-602.36 824.16,-618.36 1315.78,-618.36 1322.76,-625.34 1462.35,-625.34 ; 1630,-673.47 U1_A.27@1660.35,-673.47
  Top Layer w6.01: 1462.35,-625.34 1469.77,-625.34 1517.9,-673.47 1630,-673.47
FREQA4: J1A.64 J2A.9 J2A.10 U1_A.33 | length 1469.3
  Top Layer w6: J1A.64@222.44,-744.09 J2A.9@685.98,-744.09 741.85,-744.09 753.66,-755.91 1167.23,-755.91 1203.2,-791.87 1365.28,-791.87 ; 1630,-819.93 U1_A.33@1660.35,-819.93
  Top Layer w6.01: 1365.28,-791.87 1407.95,-791.87 1436,-819.93 1630,-819.93
FREQA5: J2A.72 U1_A.58 | length 879.5
  Top Layer w6: J2A.72@908.43,-1488.19 1188.16,-1488.19 1299.86,-1376.49 1462,-1376.49 ; 1630,-1430.16 U1_A.58@1719.4,-1430.16
  Top Layer w6.01: 1462,-1376.49 1551.48,-1376.49 1605.14,-1430.16 1630,-1430.16
FREQA6: J1A.30 U1_A.16 | length 1522.8
  Top Layer w6: J1A.30@222.44,-342.52 910.09,-342.52 960.54,-392.97 1462,-392.97 ; 1630,-404.96 U1_A.16@1719.4,-404.96
  Top Layer w6.01: 1462,-392.97 1581.74,-392.97 1593.74,-404.96 1630,-404.96
FREQA7: J2A.84 U1_A.64 | length 897
  Top Layer w6: J2A.84@908.43,-1629.92 1241.26,-1629.92 1371.75,-1499.43 1462,-1499.43 ; 1630,-1576.62 U1_A.64@1719.4,-1576.62
  Top Layer w6.01: 1462,-1499.43 1527.29,-1499.43 1604.47,-1576.62 1630,-1576.62
FREQA8: J1A.4 U1_A.3 | length 1491.8
  Top Layer w6: J1A.4@222.44,-35.43 1038.89,-35.43 1130.05,-126.6 1462,-126.6 ; 1630,-87.64 U1_A.3@1660.35,-87.64
  Top Layer w6.01: 1462,-126.6 1530.44,-126.6 1569.4,-87.64 1630,-87.64
FREQA9: J1A.16 U1_A.9 | length 1474.3
  Top Layer w6: J1A.16@222.44,-177.17 966.83,-177.17 1039.2,-249.54 1462,-249.54 ; 1630,-234.1 U1_A.9@1660.35,-234.1
  Top Layer w6.01: 1462,-249.54 1570.94,-249.54 1586.38,-234.1 1630,-234.1
FREQA10: J2A.78 U1_A.61 | length 829.2
  Top Layer w6: J2A.78@908.43,-1559.06 1213.57,-1559.05 1334.66,-1437.96 1462,-1437.96 ; 1630,-1503.39 U1_A.61@1660.35,-1503.39
  Top Layer w6.01: 1462,-1437.96 1541.82,-1437.96 1607.25,-1503.39 1630,-1503.39
FREQA11: J2A.30 U1_A.37 | length 782.8
  Top Layer w6: J2A.30@908.43,-992.13 992.5,-992.13 1038.42,-946.2 1462,-946.2 ; 1630,-917.56 U1_A.37@1660.35,-917.56
  Top Layer w6.01: 1462,-946.2 1545.85,-946.2 1574.49,-917.56 1630,-917.56
FREQA12: J1A.12 U1_A.7 | length 1662.1
  Top Layer w6: J1A.12@222.44,-129.92 988.24,-129.92 1066.88,-208.56 1280,-208.56 ; 1630,-185.28 U1_A.7@1660.35,-185.28 ; 1280,-208.56 1462,-208.56 1280,-208.56
  Top Layer w6.01: 1462,-208.56 1554.5,-208.56 1577.78,-185.28 1630,-185.28
FREQA13: J1A.36 U1_A.19 | length 1464.8
  Top Layer w6: J1A.36@222.44,-413.39 887.12,-413.39 928.17,-454.44 1462,-454.44 ; 1630,-478.19 U1_A.19@1660.35,-478.19
  Top Layer w6.01: 1462,-454.44 1547.28,-454.44 1571.04,-478.19 1630,-478.19
FREQA14: J2A.42 U1_A.43 | length 780.9
  Top Layer w6: J2A.42@908.43,-1133.86 1052.74,-1133.86 1117.46,-1069.14 1462,-1069.14 ; 1630,-1064.02 U1_A.43@1660.35,-1064.02
  Top Layer w6.01: 1462,-1069.14 1620.27,-1069.14 1625.39,-1064.02 1630,-1064.02
FREQA15: J2A.54 U1_A.49 | length 794.1
  Top Layer w6: J2A.54@908.43,-1275.59 1095.9,-1275.59 1179.41,-1192.08 1462,-1192.08 ; 1630,-1210.48 U1_A.49@1660.35,-1210.48
  Top Layer w6.01: 1462,-1192.08 1578.2,-1192.08 1596.6,-1210.48 1630,-1210.48
FREQA16: J1A.40 U1_A.21 | length 1465.4
  Top Layer w6: J1A.40@222.44,-460.63 867.14,-460.63 901.93,-495.42 1462,-495.42 ; 1630,-527.01 U1_A.21@1660.35,-527.01
  Top Layer w6.01: 1462,-495.42 1526.7,-495.42 1558.29,-527.01 1630,-527.01
FREQA17: J2A.66 U1_A.55 | length 811.7
  Top Layer w6: J2A.66@908.43,-1417.32 1152.03,-1417.32 1254.33,-1315.02 1462,-1315.02 ; 1630,-1356.93 U1_A.55@1660.35,-1356.93
  Top Layer w6.01: 1462,-1315.02 1559.35,-1315.02 1601.26,-1356.93 1630,-1356.93
FREQA18: J1A.48 U1_A.25 | length 1466.7
  Top Layer w6: J1A.48@222.44,-555.12 831.69,-555.12 853.95,-577.38 1462,-577.38 ; 1630,-624.65 U1_A.25@1660.35,-624.65
  Top Layer w6.01: 1462,-577.38 1485.53,-577.38 1532.8,-624.65 1630,-624.65
FREQA19: J1A.60 J2A.5 J2A.6 U1_A.31 | length 1468.7
  Top Layer w6: J1A.60@222.44,-696.85 J2A.5@685.98,-696.85 760.73,-696.85 772.54,-708.66 J2A.6@908.43,-708.66 1212.95,-708.66 1240.65,-736.36 1454.69,-736.36 ; 1630,-771.11 U1_A.31@1660.35,-771.11
  Top Layer w6.01: 1454.69,-736.36 1489.43,-771.11 1630,-771.11
FREQA20: J2A.90 U1_A.67 | length 846.7
  Top Layer w6: J2A.90@908.43,-1700.79 1273.29,-1700.79 1413.17,-1560.9 1462,-1560.9 ; 1630,-1649.85 U1_A.67@1660.35,-1649.85
  Top Layer w6.01: 1462,-1560.9 1510.52,-1560.9 1599.47,-1649.85 1630,-1649.85
FREQA21: J2A.58 U1_A.51 | length 800
  Top Layer w6: J2A.58@908.43,-1322.83 1114.52,-1322.83 1204.29,-1233.06 1462,-1233.06 ; 1630,-1259.3 U1_A.51@1660.35,-1259.3
  Top Layer w6.01: 1462,-1233.06 1568.07,-1233.06 1594.3,-1259.3 1630,-1259.3
FREQA22: J1A.6 U1_A.4 | length 1547.9
  Top Layer w6: J1A.6@222.44,-59.06 1027.71,-59.06 1115.74,-147.09 1462,-147.09 ; 1630,-112.05 U1_A.4@1719.4,-112.05
  Top Layer w6.01: 1462,-147.09 1538.59,-147.09 1573.62,-112.05 1630,-112.05
FREQA23: J1A.54 U1_A.28 | length 1526.7
  Top Layer w6: J1A.54@222.44,-625.98 790.66,-625.98 803.52,-638.85 1285.11,-638.85 1299.36,-653.09 1462.35,-653.09 ; 1630,-697.88 U1_A.28@1719.4,-697.88
  Top Layer w6.01: 1462.35,-653.09 1466.75,-653.09 1511.53,-697.88 1630,-697.88
FREQA24: J1A.18 U1_A.10 | length 1530.4
  Top Layer w6: J1A.18@222.44,-200.79 958.31,-200.79 1027.55,-270.03 1462,-270.03 ; 1630,-258.51 U1_A.10@1719.4,-258.51
  Top Layer w6.01: 1462,-270.03 1573.85,-270.03 1585.37,-258.51 1630,-258.51
FREQA25: J1A.28 U1_A.15 | length 1463.4
  Top Layer w6: J1A.28@222.44,-318.9 915.47,-318.9 969.05,-372.48 1462,-372.48 ; 1630,-380.56 U1_A.15@1660.35,-380.56
  Top Layer w6.01: 1462,-372.48 1588.45,-372.48 1596.53,-380.56 1630,-380.56
FREQA26: J2A.34 U1_A.39 | length 782.2
  Top Layer w6: J2A.34@908.43,-1039.37 1014.02,-1039.37 1066.21,-987.18 1462,-987.18 ; 1630,-966.38 U1_A.39@1660.35,-966.38
  Top Layer w6.01: 1462,-987.18 1560.44,-987.18 1581.24,-966.38 1630,-966.38
FREQA27: J2A.82 U1_A.63 | length 835
  Top Layer w6: J2A.82@908.43,-1606.3 1228.37,-1606.3 1355.72,-1478.94 1462,-1478.94 ; 1630,-1552.21 U1_A.63@1660.35,-1552.21
  Top Layer w6.01: 1462,-1478.94 1533.91,-1478.94 1607.17,-1552.21 1630,-1552.21
FREQA28: J1A.66 J2A.11 J2A.12 U1_A.34 | length 1528.7
  Top Layer w6: J1A.66@222.44,-767.72 J2A.11@685.98,-767.72 724.84,-767.72 736.65,-779.53 1143.07,-779.53 1183.17,-819.63 1365.28,-819.63 ; 1630,-844.33 U1_A.34@1719.4,-844.33
  Top Layer w6.01: 1365.28,-819.63 1382.73,-819.63 1407.43,-844.33 1630,-844.33
FREQA29: J2A.48 U1_A.46 | length 844.4
  Top Layer w6: J2A.48@908.43,-1204.72 1078.15,-1204.72 1152.26,-1130.61 1462,-1130.61 ; 1630,-1137.25 U1_A.46@1719.4,-1137.25
  Top Layer w6.01: 1462,-1130.61 1586.07,-1130.61 1592.71,-1137.25 1630,-1137.25
FREQA30: J2A.70 U1_A.57 | length 817.5
  Top Layer w6: J2A.70@908.43,-1464.57 1175.78,-1464.57 1284.35,-1356 1462,-1356 ; 1630,-1405.75 U1_A.57@1660.35,-1405.75
  Top Layer w6.01: 1462,-1356 1553.65,-1356 1603.4,-1405.75 1630,-1405.75
FREQA31: J1A.42 U1_A.22 | length 1524.8
  Top Layer w6: J1A.42@222.44,-484.25 861.41,-484.25 893.07,-515.91 1462,-515.91 ; 1630,-551.42 U1_A.22@1719.4,-551.42
  Top Layer w6.01: 1462,-515.91 1517.84,-515.91 1553.35,-551.42 1630,-551.42
FREQA32: J2A.60 U1_A.52 | length 862
  Top Layer w6: J2A.60@908.43,-1346.46 1122.31,-1346.46 1215.21,-1253.55 1462,-1253.55 ; 1630,-1283.7 U1_A.52@1719.4,-1283.7
  Top Layer w6.01: 1462,-1253.55 1566.77,-1253.55 1596.93,-1283.7 1630,-1283.7
FREQA33: R1_A.2 U1_A.1 | length 964.7
  Top Layer w6: R1_A.2@777,64 1118.5,64 1268.11,-85.62 1462,-85.62 ; 1630,-38.82 U1_A.1@1660.35,-38.82
  Top Layer w6.01: 1462,-85.62 1517.02,-85.62 1563.81,-38.82 1630,-38.82
FREQA34: R2_A.2 U1_A.68 | length 1616.7
  Top Layer w6: R2_A.2@236.94,-1651.23 374.8,-1651.23 455.44,-1731.87 1276.54,-1731.87 1427.02,-1581.39 1462,-1581.39 ; 1630,-1674.26 U1_A.68@1719.4,-1674.26
  Top Layer w6.01: 1462,-1581.39 1508.09,-1581.39 1600.95,-1674.26 1630,-1674.26
FREQA35: J1A.22 U1_A.12 | length 1524.6
  Top Layer w6: J1A.22@222.44,-248.03 942.53,-248.03 1005.5,-311.01 1462,-311.01 ; 1630,-307.33 U1_A.12@1719.4,-307.33
  Top Layer w6.01: 1462,-311.01 1588.71,-311.01 1592.39,-307.33 1630,-307.33
FREQA36: J2A.32 U1_A.38 | length 841.5
  Top Layer w6: J2A.32@908.43,-1015.75 1003.26,-1015.75 1052.32,-966.69 1462,-966.69 ; 1630,-941.97 U1_A.38@1719.4,-941.97
  Top Layer w6.01: 1462,-966.69 1556.03,-966.69 1580.75,-941.97 1630,-941.97
FREQA37: J1A.34 U1_A.18 | length 1523.5
  Top Layer w6: J1A.34@222.44,-389.76 894.19,-389.76 938.38,-433.95 1462,-433.95 ; 1630,-453.78 U1_A.18@1719.4,-453.78
  Top Layer w6.01: 1462,-433.95 1557.58,-433.95 1577.41,-453.78 1630,-453.78
FREQA38: J2A.44 U1_A.44 | length 839.6
  Top Layer w6: J2A.44@908.43,-1157.48 1066.87,-1157.48 1134.72,-1089.63 1462,-1089.63 ; 1630,-1088.43 U1_A.44@1719.4,-1088.43
  Top Layer w6.01: 1462,-1089.63 1608.67,-1089.63 1609.87,-1088.43 1630,-1088.43
FREQA39: J1A.14 U1_A.8 | length 1536.3
  Top Layer w6: J1A.14@222.44,-153.54 980.61,-153.54 1056.11,-229.05 1462,-229.05 ; 1630,-209.69 U1_A.8@1719.4,-209.69
  Top Layer w6.01: 1462,-229.05 1561.39,-229.05 1580.75,-209.69 1630,-209.69
FREQA40: J1A.62 J2A.7 J2A.8 U1_A.32 | length 1528
  Top Layer w6: J1A.62@222.44,-720.47 J2A.7@685.98,-720.47 751.98,-720.47 763.79,-732.28 1190.68,-732.28 1222.51,-764.12 1365.28,-764.12 ; 1630,-795.52 U1_A.32@1719.4,-795.52
  Top Layer w6.01: 1365.28,-764.12 1427.44,-764.12 1458.84,-795.52 1630,-795.52
FREQA41: J2A.68 U1_A.56 | length 873.6
  Top Layer w6: J2A.68@908.43,-1440.94 1162.41,-1440.94 1267.84,-1335.51 1462,-1335.51 ; 1630,-1381.34 U1_A.56@1719.4,-1381.34
  Top Layer w6.01: 1462,-1335.51 1556.28,-1335.51 1602.11,-1381.34 1630,-1381.34
FREQA42: J2A.80 U1_A.62 | length 891.2
  Top Layer w6: J2A.80@908.43,-1582.68 1220.3,-1582.68 1344.52,-1458.45 1462,-1458.45 ; 1630,-1527.8 U1_A.62@1719.4,-1527.8
  Top Layer w6.01: 1462,-1458.45 1539.65,-1458.45 1608.99,-1527.8 1630,-1527.8
FREQA43: J1A.58 J2A.3 J2A.4 U1_A.30 | length 1527.4
  Top Layer w6: J1A.58@222.44,-673.23 J2A.3@685.98,-673.23 766.95,-673.23 778.76,-685.04 J2A.4@908.43,-685.04 1229.12,-685.04 1252.68,-708.61 1462.35,-708.61 ; 1630,-746.7 U1_A.30@1719.4,-746.7
  Top Layer w6.01: 1462.35,-708.61 1462.84,-708.61 1500.93,-746.7 1630,-746.7
FREQA44: J2A.56 U1_A.50 | length 856.1
  Top Layer w6: J2A.56@908.43,-1299.21 1108.66,-1299.21 1195.3,-1212.57 1462,-1212.57 ; 1630,-1234.89 U1_A.50@1719.4,-1234.89
  Top Layer w6.01: 1462,-1212.57 1573.36,-1212.57 1595.67,-1234.89 1630,-1234.89